# Altium PCB Blinking_Light_Project.PcbDoc
Units mil, origin at the board's own origin, x right, y up, seen from the top; angles counter-clockwise.
Board outline 6000 x 4000 mil, 2 copper layers (Top Layer, Bottom Layer); 9 components, 6 nets, 47 pads, 0 vias.
Unrouted connection lines stored in the file: 15.
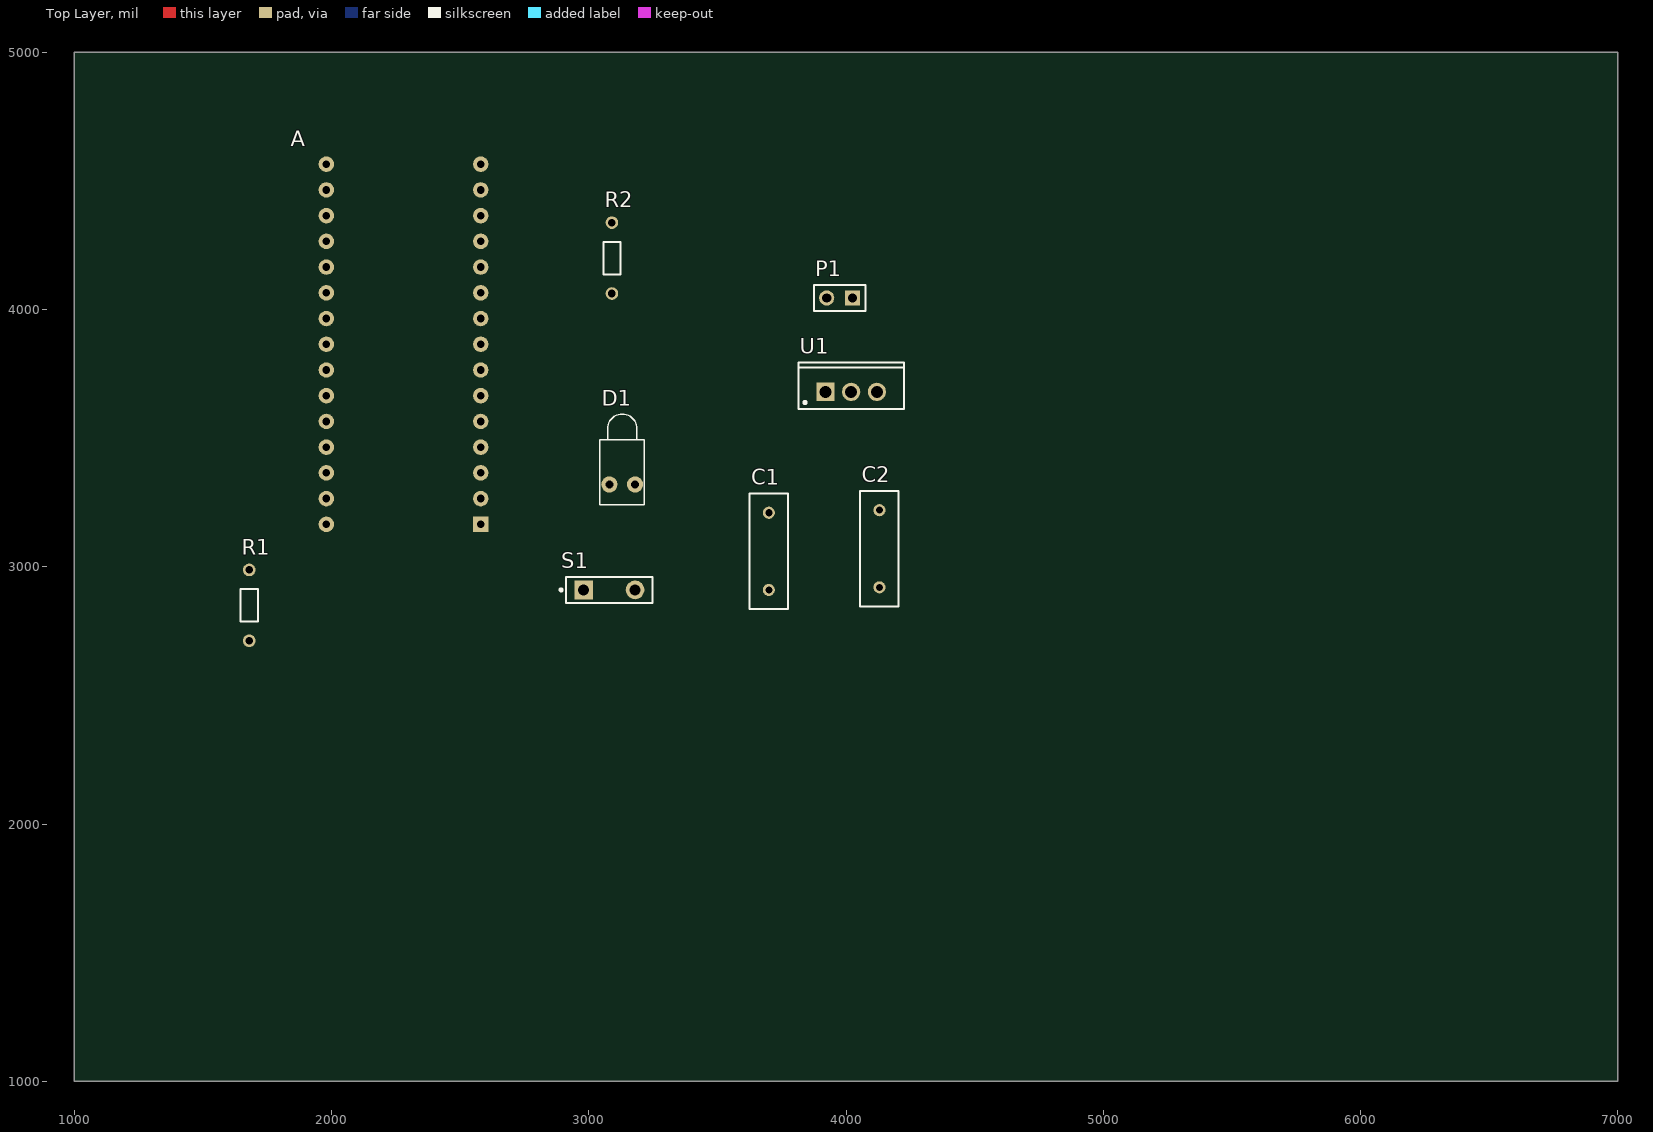
[diagram p0: Top Layer view]
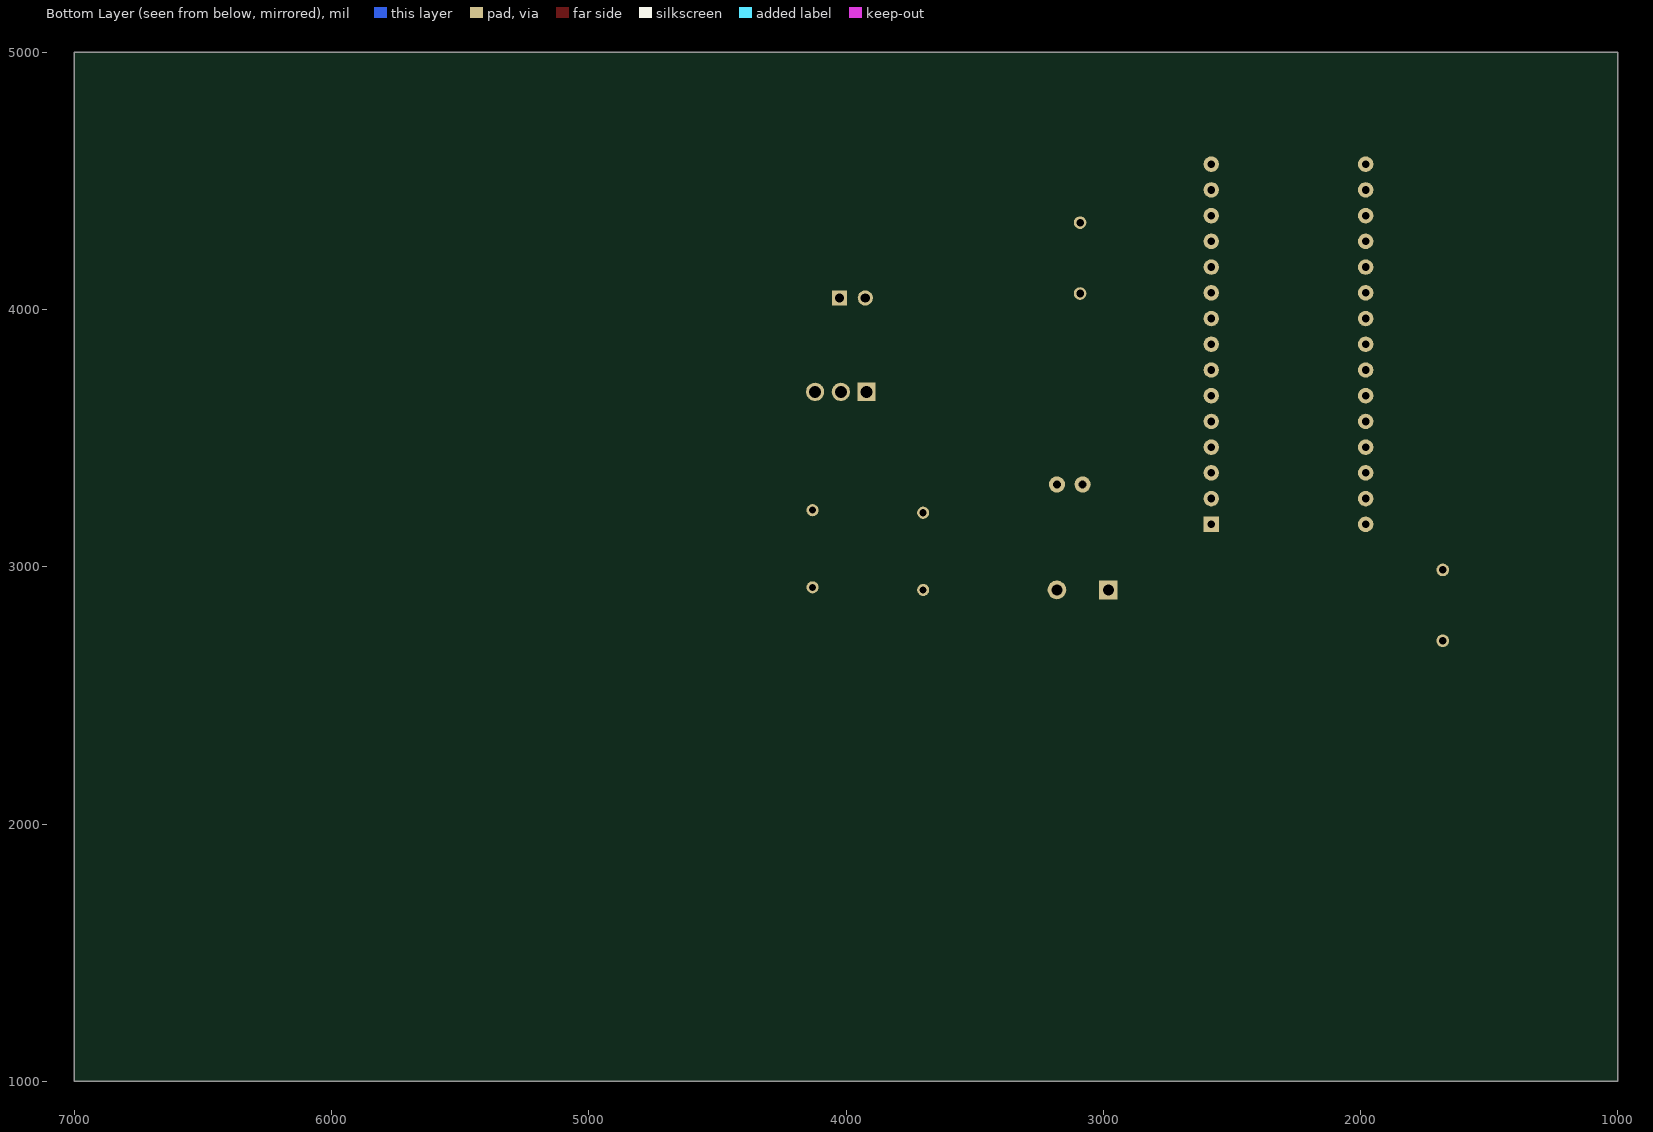
[diagram p1: Bottom Layer view, seen from below]

## Layer stack, top to bottom
Top Solder: solder mask 0.4, Solder Resist, Dk 3.5
Top Layer: signal copper 1.4
Dielectric 1: dielectric 12.6, FR-4, Dk 4.8
Bottom Layer: signal copper 1.4
Bottom Solder: solder mask 0.4, Solder Resist, Dk 3.5

## Board outline
1000,1000 7000,1000 7000,5000 1000,5000

## Design rules (kind name [scope] priority, off if disabled: settings)
Clearance [All] p1: gap=10 ignorepadtopadclearanceinfootprint=FALSE except(0: Arc-Hole Track-Hole SMDPad-Hole THPad-Hole Via-Hole Fill-Hole Poly-Hole Region-Hole Text-Hole)
PolygonConnect [All] p1: connectstyle=Relief reliefconductorwidth=10 reliefentries=4 polygonreliefangle="90 Angle" airgapwidth=10
RoomDefinition First_Schematic [InComponentClass('First_Schematic')] p1: confinementstyle=ConfineIn formatcopy=TRUE lockcomponents=FALSE outline 7045,1060 9390,1060 9390,2775 7045,2775
RoutingVias [All] p1: holewidth=28 width=50 viastyle="Through Hole" minholewidth=28 minwidth=50 maxholewidth=28 maxwidth=50
SolderMaskExpansion [All] p1: expansion=4
Width [All] p1: maxlimit=10 minlimit=10 preferedwidth=10
30 further rules are at their usual default settings.

## Components (designator, comment, footprint, x,y, rotation, side; value= is the part's Value field where it differs from the comment)
A "arduinoNano" "Arduino nano" 2640,3005 r90 top
C1 "Cap" RAD-0.3 3700,3060 r270 top value=100pF
C2 "Cap" RAD-0.3 4130,3070 r90 top value=100pF
D1 "LED1" LED-1 3130,3320 r90 top
P1 "9V Battery" HDR1X2 4025,4045 r180 top
R1 "15 K" YFDZ-MFJRY13-2_M 1680,2850 r90 top
R2 "220" YFDZ-MFJRY13-2_M 3090,4200 r90 top
S1 "SW-SPST" SPST-2 3080,2910 r0 top
U1 "L7805ABP" TO220FP 4020,3680 r0 top

## Footprints (in the part's own frame and the unit in brackets; to place one, negate y for a bottom-side part, rotate by r counter-clockwise, add the part's x,y. Pads: shape width x height; smd on the part's side, far side on the other; paste and mask are expansions set on the pad)
"Arduino nano" [mil] "arduino nano"
  rect 60x60 hole 30: 0(160,60)
  round 60 hole 30: 1(260,60) 2(360,60) 3(460,60) 4(560,60) 5(660,60) 6(760,60) 7(860,60) 8(960,60) 9(1060,60) 10(1160,60) 11(1260,60) 12(1360,60) 13(1460,60) 14(1560,60) 15(1560,660) 16(1460,660) 17(1360,660) 18(1260,660) 19(1160,660) 20(1060,660) 21(960,660) 22(860,660) 23(760,660) 24(660,660) 25(560,660) 26(460,660) 27(360,660) 28(260,660) 29(160,660)
HDR1X2 [mm] "Connector; Header; 2 Position"
  rect 1.5x1.5 hole 0.9: 1(0,0)
  round 1.5 hole 0.9: 2(2.54,0)
  silkscreen extent -1.27,-1.27 3.81,1.27
LED-1 [mm] "LED; 2 Leads"
  round 1.6 hole 0.8: 1(0,1.27) 2(0,-1.27)
  silkscreen extent -2,-2.2 6.95,2.2
RAD-0.3 [mm] "Radial Cap, Thru-Hole; 2 Leads; 0.3 in Pin Spacing"
  round 1.2 hole 0.7: 1(-3.81,0) 2(3.81,0)
  silkscreen extent -5.71,-1.91 5.71,1.91
SPST-2 [mm] "Switch; 2 Leads"
  rect 1.85x1.85 hole 1.1: 1(-2.54,0)
  round 1.85 hole 1.1: 2(2.54,0)
  silkscreen extent -4.89,-1.27 4.28,1.27
TO220FP [mm] "TO, Thru-Hole, Vertical, Heatsink Mounted; 3 In-Line Leads; Pitch 2.54 mm"
  rect 1.8x1.8 hole 1.2: 1(-2.54,0)
  round 1.8 hole 1.2: 2(0,0) 3(2.54,0)
  silkscreen extent -5.2,-1.7 5.2,2.9, body extent -5.25,-1.75 5.25,2.95, height 20
YFDZ-MFJRY13-2_M [mm] "Through Hole Resistor, 2-Leads, Dia 1.7mm, Body Length 3.2mm, Pin Spacing 7mm, IPC Low Density"
  round 1.25 hole 0.75: 1(-3.5,0) 2(3.5,0)
  silkscreen extent -1.6,-0.85 1.6,0.85, body extent -3.7,-0.85 3.71,0.85, height 1.69

## Part data
C1 C2: "Capacitor", LatestRevisionDate=17-Jul-2002, LatestRevisionNote="Re-released for DXP Platform.", PackageDescription="Radial Cap, Thru-Hole; 2 Leads; 0.3 in Pin Spacing", PackageReference=RAD-0.3, Published=8-Jun-2000, Publisher="Altium Limited"
D1: "Typical RED GaAs LED", LatestRevisionDate=08-Jul-2005, LatestRevisionNote="Mech Layer 1 removed.", PackageDescription="LED; 2 Leads", PackageReference=LED-1, Published=8-Jun-2000, Publisher="Altium Limited"
P1: library part "Header 2", "Header, 2-Pin", LatestRevisionDate=17-Jul-2002, LatestRevisionNote="Re-released for DXP Platform.", Publisher="Altium Limited"
R1 R2: library part CMP-0923-00002-1, "Metal Film Fixed Resistor, 51 KOhm +/- 5%, -55 to 155 degC, 2-Pin THD, Dia 1.7 mm, Body Length 3.2 mm, RoHS", Insulation Voltage (Max.) (V)=200, Load Voltage (Max.) (V)=300, Manufacturer="YingFa Electronics", Operating Voltage (Max.) (V)=150, PartNumber=MFJRY13T52051K00, Resistance (Ohm)=51000, Temperature Range="-55 to 155 degC", Accuracy="+/- 5%", ComponentLink1Description="Manufacturer URL", ComponentLink1URL=http://www.szyfdz.net/, ComponentLink2Description=Datasheet, ComponentLink2URL=http://www.szyfdz.net/mojinshuyanghuamodianzu/, Mounting Technology="Through Hole", PackageDescription="2-Pin Through Hole Resistor, Dia 1.7 mm, Body Length 3.2 mm", PackageReference=MFJRY13-2, Pulsed Voltage (Max.) (V)=300, RoHS=TRUE
S1: "Single-Pole, Single-Throw Switch", LatestRevisionDate=17-Jul-2002, LatestRevisionNote="Re-released for DXP Platform.", PackageDescription="Switch; 2 Leads", PackageReference=SPST-2, Published=24-Mar-1999, Publisher="Altium Limited"
U1: library part CMP-0244-00479-1, "Positive Voltage Regulator, 5V, 3-Pin TO-220FP", ComponentLink1Description="Manufacturer URL", ComponentLink1URL=http://www.st.com, ComponentLink2Description=Datasheet, ComponentLink2URL=http://www.st.com/internet/com/TECHNICAL_RESOURCES/TECHNICAL_LITERATURE/DATASHEET/CD00000444.pdf, DatasheetVersion=16/11/2011, PackageDescription="TO, Thru-Hole, Vertical, Heatsink Mounted; 3 In-Line Leads; Pitch 2.54 mm", PackageReference=TO220FP, PackageVersion=2011

## Nets (pads, with @x,y where several pads share a name; then routed paths per layer and width w, separated by ;. In a path a pad name is that pad's centre, name@x,y a point inside that pad or via, vN(x,y) a via of type N, cw(c..) or ccw(c..) an arc to the next point about the centre after c; other vN are vias at no path point)
GND: A.3 C1.2 C2.1 D1.2 P1.1 S1.2 U1.2
NetA_4: A.4 R1.1 S1.1
NetA_13: A.13 R2.2
NetA_26: A.26 C2.2 R1.2 U1.3
NetC1_1: C1.1 P1.2 U1.1
NetD1_1: D1.1 R2.1
pads on no net: A.0 A.1 A.2 A.5 A.6 A.7 A.8 A.9 A.10 A.11 A.12 A.14 A.15 A.16 A.17 A.18 A.19 A.20 A.21 A.22 A.23 A.24 A.25 A.27 A.28 A.29